# Altium PCB BB8_Flywheel_Motors.PcbDoc
Units mil, origin at the board's own origin, x right, y up, seen from the top; angles counter-clockwise.
Board outline 4810.08 x 1771.99 mil, 2 copper layers (Top Layer, Bottom Layer), stack 59.8 mil thick; 13 components, 2 nets, 33 pads, 240 vias.
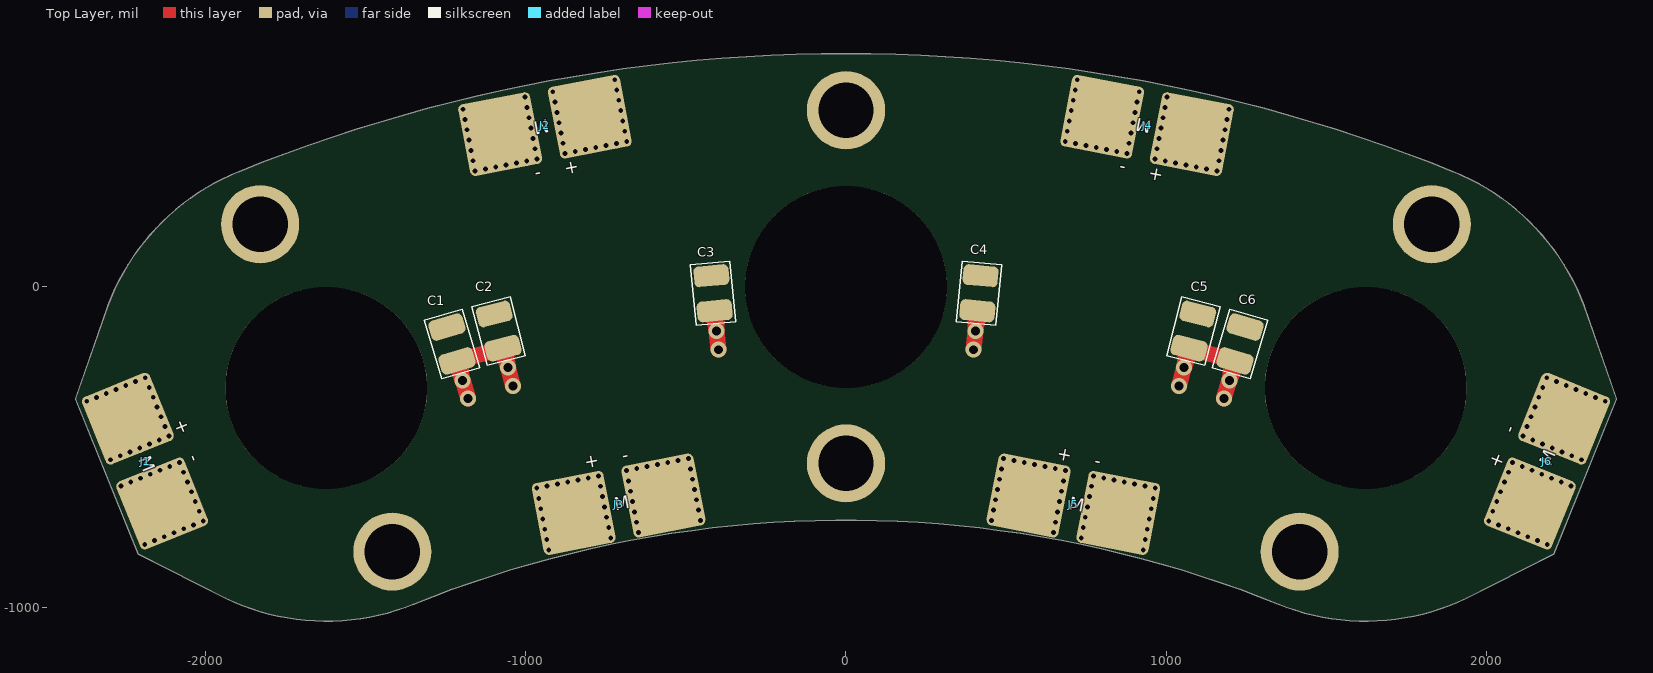
[diagram p0: Top Layer view]
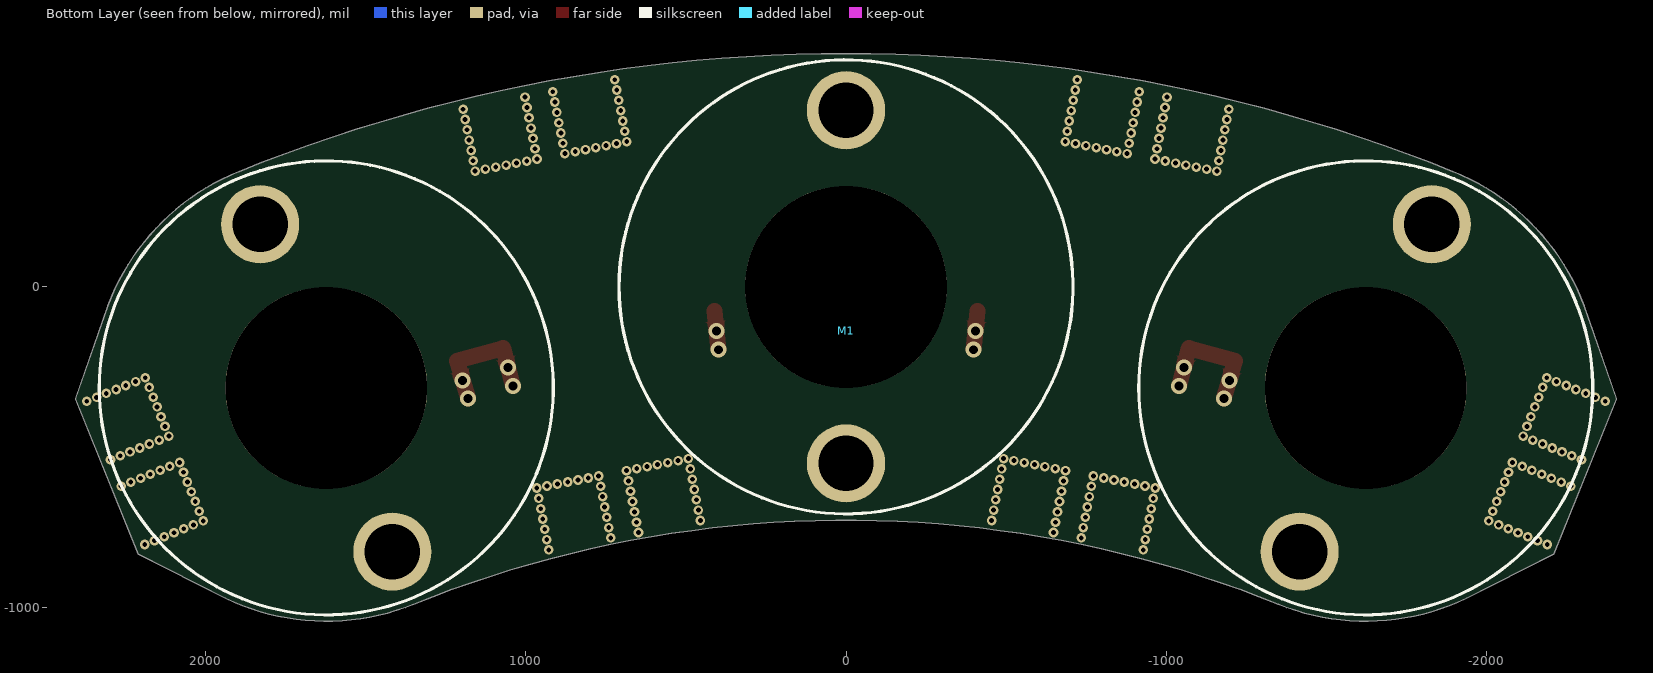
[diagram p1: Bottom Layer view, seen from below]

## Layer stack, top to bottom
Top Solder: solder mask 0.4, Solder Resist, Dk 3.5
Top Layer: signal copper 1.4
Dielectric 1: dielectric 57, FR-4, Dk 4.8
Bottom Layer: signal copper 1.4
Bottom Solder: solder mask 0.4, Solder Resist, Dk 3.5

## Board outline
-2209.1,-834.49 -2405.04,-349.53 -2304.54,-60.28 -2304.54,-60.29 cw(c-1622.31,-315.35) -1895.15,359.96 cw(c0,-4330.71) 1895.15,359.96 cw(c1622.31,-315.35) 2304.54,-60.29 2304.54,-60.28 2405.04,-349.53 2209.1,-834.49 1935.88,-972.75 1935.88,-972.74 cw(c1622.31,-315.35) 1349.47,-990.66 ccw(c0,-4330.71) -1349.47,-990.66 cw(c-1622.31,-315.35) -1935.88,-972.74 -1935.88,-972.75

## Design rules (kind name [scope] priority, off if disabled: settings)
BoardOutlineClearance [All] p1: gap=0 ignorepadtopadclearanceinfootprint=FALSE except(16: Poly-OutlineEdge)
Clearance Clearance_HV [InNetClass('HV') vs NOT ((OnLayer('Top Overlay') OR OnLayer('Bottom Overlay')))] p1: gap=50 ignorepadtopadclearanceinfootprint=FALSE except(0: Arc-Hole Track-Hole SMDPad-Hole THPad-Hole Via-Hole Fill-Hole Poly-Hole Region-Hole Text-Hole; 40: THPad-THPad)
Clearance Clearance_MV [InNetClass('MV') vs NOT ((OnLayer('Top Overlay') OR OnLayer('Bottom Overlay')))] p2: gap=20 ignorepadtopadclearanceinfootprint=FALSE except(0: Arc-Hole Track-Hole SMDPad-Hole THPad-Hole Via-Hole Fill-Hole Poly-Hole Region-Hole Text-Hole)
Clearance "Polygon Clearance" [InPoly] p3: gap=16 ignorepadtopadclearanceinfootprint=FALSE except(0: Arc-Hole Track-Hole SMDPad-Hole THPad-Hole Via-Hole Fill-Hole Poly-Hole Region-Hole Text-Hole)
Clearance [NOT ((OnLayer('Top Overlay') OR OnLayer('Bottom Overlay')))] p4: gap=7.5 ignorepadtopadclearanceinfootprint=FALSE except(0: Arc-Hole Track-Hole SMDPad-Hole THPad-Hole Via-Hole Fill-Hole Poly-Hole Region-Hole Text-Hole)
ComponentClearance [All] p1: gap=0.1 collisioncheckmode=3 verticalgap=0 showdistances=FALSE
DiffPairsRouting [All] p1: maxlimit=12 minlimit=7.5 mostfreqgap=7.5 toplayer_minwidth=6 toplayer_maxwidth=12 toplayer_prefwidth=10 bottomlayer_minwidth=6 bottomlayer_maxwidth=12 bottomlayer_prefwidth=10 maxuncoupledlength=500
Height [All] p1: minheight=0 maxheight=39370.08 prefheight=500
HoleSize [All] p1: absolutevalues=TRUE maxlimit=250 minlimit=15 maxpercent=80.000 minpercent=20.000
MinimumSolderMaskSliver [All] p1 off: minsoldermaskwidth=4
PlaneClearance PlaneClearance_HV [InNetClass('HV')] p1: clearance=50
PlaneClearance PlaneClearance_MV [InNetClass('MV')] p2: clearance=30
PlaneClearance [All] p3: clearance=20
PlaneConnect [All] p1: planeconnectstyle=Relief reliefexpansion=10 reliefentries=4 reliefconductorwidth=12 reliefairgap=6
PolygonConnect [All] p1: thpad.connectstyle=Relief thpad.reliefconductorwidth=80 thpad.reliefentries=4 thpad.polygonreliefangle="90 Angle" thpad.airgapwidth=7.5 smdpad.connectstyle=Direct smdpad.reliefconductorwidth=12 smdpad.reliefentries=4 smdpad.polygonreliefangle="90 Angle" smdpad.airgapwidth=7.5 via.connectstyle=Direct via.reliefconductorwidth=12 via.reliefentries=4 via.polygonreliefangle="90 Angle" via.airgapwidth=7.5
RoutingVias [All] p1: holewidth=15 width=30 viastyle="Through Hole" minholewidth=15 minwidth=20 maxholewidth=250 maxwidth=500
SMDNeckDown [All] p1: percent=100.000
SilkToSilkClearance [All] p1 off: silktosilkclearance=10
SilkToSolderMaskClearance [IsPad] p1: minsilkscreentomaskgap=6 clearancetoexposedcopper=TRUE
SolderMaskExpansion [All] p1: expansion=4
ViasUnderSMD [All] p1: allowed=FALSE
Width [All] p1: maxlimit=1000 minlimit=6 preferedwidth=10 minimp=50.000000 maximp=50.000000 favimp=50.000000 checkconnectedcopper=TRUE
21 further rules are at their usual default settings.

## Components (designator, comment, footprint, x,y, rotation, side; value= is the part's Value field where it differs from the comment)
C1 "C_1210_10uF" 1210_Capacitor -1229.99,-178.34 r106.5 top value=10uF
C2 "C_1210_10uF" 1210_Capacitor -1084.32,-137.94 r104.5 top value=10uF
C3 "C_1210_10uF" 1210_Capacitor -415.08,-19.94 r95.5 top value=10uF
C4 "C_1210_10uF" 1210_Capacitor 415.08,-19.94 r84.5 top value=10uF
C5 "C_1210_10uF" 1210_Capacitor 1084.32,-137.94 r75.5 top value=10uF
C6 "C_1210_10uF" 1210_Capacitor 1229.99,-178.34 r73.5 top value=10uF
J1 "XT60" J_XT60_SMD_RA_Male -2188.12,-543.95 r292 top
J2 "XT60" J_XT60_SMD_RA_Male -939.77,503.99 r191 top
J3 "XT60" J_XT60_SMD_RA_Male -709.9,-678.59 r11 top
J4 "XT60" J_XT60_SMD_RA_Male 939.77,503.99 r169 top
J5 "XT60" J_XT60_SMD_RA_Male 709.9,-678.59 r349 top
J6 "XT60" J_XT60_SMD_RA_Male 2188.12,-543.95 r68 top
M1 "BB8 flywheel motor assembly" BB8_Flywheel_Motors_DC_36mm 0,0 r180 bottom locked

## Footprints (in the part's own frame and the unit in brackets; to place one, negate y for a bottom-side part, rotate by r counter-clockwise, add the part's x,y. Pads: shape width x height; smd on the part's side, far side on the other; paste and mask are expansions set on the pad)
1210_Capacitor [mil] "1210 Capacitor"
  rrect50% 65x110 smd: 1(-55,0) 2(55,0)
  silkscreen extent -95,-62 95,62, body extent -84,-54 82,52, height 36
BB8_Flywheel_Motors_DC_36mm [mm] "3 motors all working together to spin the BB8 Flywheel"
  round 6.2 hole 4.4: 1(-46.451,4.971) 1(0,14) 1(46.451,4.971) 2(-35.962,-20.99) 2(0,-14) 2(35.962,-20.99)
  round 16 hole 16 unplated: ""(-41.207,-8.01) ""(0,0) ""(41.207,-8.01)
  silkscreen extent -59.21,-26.01 59.2,18, body extent -148.1,-189.48 148.1,38, height 98.01
J_XT60_SMD_RA_Male [mm]
  rrect15% 5.8x5.8 smd: 1(-3.625,0) 2(3.625,0)
  body extent -7.95,-19.45 7.95,1.75, height 6.18

## Part data
C1 C2 C3 C4 C5 C6: "CAP CER 10UF 50V 10% X5R 1210", Manufacturer="Taiyo Yuden", Manufacturer PN=UMK325BJ106KM-T, Package=1210, Supplier Part Number 1=587-2247-1-ND, Supplier 1=Digi-Key, SVP Creator="Matt Rogge"
J1 J2 J3 J4 J5 J6: library part J_XT60, "60 Amp XT60 Connector"
M1: library part BB8_Flywheel_Motors

## Via types
v1: diameter 30, hole 15, Top Layer to Bottom Layer, tented bottom, 228 vias
v2: diameter 50, hole 28, Top Layer to Bottom Layer, tented both sides, 12 vias

## Nets (pads, with @x,y where several pads share a name; then routed paths per layer and width w, separated by ;. In a path a pad name is that pad's centre, name@x,y a point inside that pad or via, vN(x,y) a via of type N, cw(c..) or ccw(c..) an arc to the next point about the centre after c; other vN are vias at no path point)
MOTOR+: C1.2 C2.2 C3.2 C4.2 C5.2 C6.2 J1.1 J2.1 J3.1 J4.1 J5.1 J6.1 M1.1
  other v1: -927.83,-821.22 2189.05,-804.41 2158.64,-792.13 -934.1,-789.03 -734.6,-783.66 2128.22,-779.84 2097.8,-767.54 647.64,-766.76 -940.36,-756.83 2067.38,-755.26 -740.87,-751.47 2036.96,-742.97 653.89,-734.56 2006.54,-730.67 454.41,-729.2 -946.61,-724.62 -747.13,-719.26 660.15,-702.36 2018.82,-700.24 460.65,-697 -952.88,-692.41 -753.37,-687.06 666.42,-670.15 2031.11,-669.83 466.91,-664.8 -959.14,-660.21 -759.65,-654.85 2043.41,-639.41 672.67,-637.95 473.19,-632.59 -965.39,-628 -765.91,-622.65 -933.19,-621.73 2262.79,-621.89 -900.98,-615.47 2232.38,-609.62 -868.77,-609.22 2055.69,-608.99 678.93,-605.74 -836.57,-602.95 479.43,-600.39 -804.36,-596.69 2201.96,-597.33 -772.15,-590.44 2171.54,-585.02 2067.98,-578.57 685.2,-573.54 2141.12,-572.75 485.69,-568.18 653,-567.26 620.79,-561 2110.7,-560.45 588.58,-554.76 556.38,-548.48 2080.28,-548.15 524.17,-542.22 -2295.97,-539.76 491.97,-535.98 -2265.57,-527.46 -2235.15,-515.17 -2204.73,-502.89 -2174.31,-490.59 -2143.89,-478.3 -2113.47,-466.02 -2125.75,-435.6 -2138.04,-405.18 -2150.34,-374.76 -2369.71,-357.24 -2339.31,-344.94 -2162.62,-344.34 -2308.89,-332.65 -2278.47,-320.37 -2174.91,-313.92 -2248.05,-308.07 -2217.63,-295.78 -2187.21,-283.5 1157.7,361.38 1125.5,367.63 1093.29,373.89 1061.09,380.16 1028.88,386.41 996.67,392.67 1163.98,393.58 964.47,398.94 -877.52,415.84 -845.31,422.09 1170.24,425.79 -813.1,428.35 970.74,431.14 -780.9,434.62 -748.69,440.87 -716.49,447.13 -883.76,448.05 -684.28,453.4 1176.49,458 977,463.35 -890.02,480.26 -690.53,485.61 1182.76,490.2 983.25,495.56 -896.3,512.46 -696.79,517.82 1189.02,522.4 989.52,527.76 -902.54,544.67 -703.06,550.02 1195.26,554.6 995.78,559.96 -908.8,576.87 -709.31,582.23 1002.03,592.16 -915.07,609.06 -715.57,614.43 -721.84,646.62
MOTOR-: C1.1 C2.1 C3.1 C4.1 C5.1 C6.1 J1.2 J2.2 J3.2 J4.2 J5.2 J6.2 M1.2 | length 1031.5
  Top Layer w50: v2(-1179.67,-348.21) v2(-1196.44,-291.59) C1.1 C2.1 v2(-1054.75,-252.29) v2(-1039.96,-309.47) ; C3.1 v2(-403.76,-137.51) v2(-398.1,-196.29) ; v2(398.1,-196.29) v2(403.76,-137.51) C4.1 ; v2(1039.96,-309.47) v2(1054.75,-252.29) C5.1 C6.1 v2(1196.44,-291.59) v2(1179.67,-348.21)
  other v1: 927.83,-821.22 -2189.05,-804.41 -2158.64,-792.13 934.1,-789.03 734.6,-783.66 -2128.22,-779.84 -2097.8,-767.54 -647.64,-766.76 940.36,-756.83 -2067.38,-755.26 740.84,-751.47 -2036.96,-742.97 -653.91,-734.57 -2006.54,-730.67 -454.41,-729.2 946.61,-724.62 747.1,-719.26 -660.17,-702.36 -2018.84,-700.26 -460.65,-697 952.88,-692.41 753.37,-687.06 -2031.14,-669.84 -666.42,-670.15 -466.91,-664.8 959.14,-660.21 759.62,-654.85 -2043.41,-639.41 -672.69,-637.95 -473.19,-632.59 965.39,-628 765.88,-622.64 -2262.79,-621.89 933.18,-621.75 900.97,-615.49 -2232.39,-609.59 -2055.72,-609 868.77,-609.22 -678.95,-605.75 836.56,-602.97 -479.43,-600.39 -2201.97,-597.3 804.36,-596.71 772.15,-590.44 -2171.54,-585.02 -2068.01,-578.58 -685.2,-573.54 -2141.13,-572.72 -485.69,-568.18 -652.99,-567.29 -620.79,-561.03 -2110.71,-560.43 -588.58,-554.76 -556.37,-548.51 -2080.28,-548.15 -524.17,-542.25 2295.97,-539.76 -491.97,-535.98 2265.56,-527.48 2235.14,-515.19 2204.73,-502.89 2174.3,-490.61 2143.88,-478.32 2113.47,-466.02 2125.77,-435.61 2138.06,-405.19 2150.34,-374.76 2369.71,-357.24 2339.31,-344.94 2162.64,-344.35 2308.89,-332.65 2278.47,-320.37 2174.93,-313.93 2248.05,-308.07 2217.63,-295.78 2187.21,-283.5 -1157.7,361.38 -1125.5,367.65 -1093.3,373.91 -1061.09,380.16 -1028.88,386.43 -996.68,392.69 -1163.98,393.58 -964.47,398.94 877.52,415.84 845.31,422.11 -1170.24,425.79 813.11,428.37 -970.72,431.15 780.9,434.62 748.7,440.89 716.49,447.16 883.79,448.05 684.28,453.4 -1176.48,458 -976.98,463.35 890.05,480.25 690.53,485.61 -1182.76,490.2 -983.25,495.56 896.3,512.46 696.79,517.82 -1189.02,522.4 -989.5,527.76 902.57,544.66 703.06,550.02 -1195.26,554.6 -995.76,559.97 908.83,576.87 709.31,582.23 -1002.03,592.16 915.07,609.06 715.57,614.43 721.84,646.62
pads on no net: M1.

## Polygon pours and split planes (outlines as drawn)
MOTOR+ on Top Layer "Motor+" (solid, remove dead copper, shelved, pour order 0): -3937.01,1279.53 3937.01,1279.53 3937.01,-1476.38 -3937.01,-1476.38
MOTOR- on Bottom Layer "Motor-" (solid, remove dead copper, shelved, pour order 2): 3937.01,1279.53 -3937.01,1279.53 -3937.01,-1476.38 3937.01,-1476.38

## Silkscreen, mask and mechanical layers (free items; w line width, h text height)
Mechanical 1:
  lines w10: -2304.54,-60.28 -2405.04,-349.53 -2209.1,-834.49 -1935.88,-972.75 ; 1935.88,-972.75 2209.1,-834.49 2405.04,-349.53 2304.54,-60.28
Mechanical 13:
  lines w10: -2304.54,-60.29 cw(c-1622.31,-315.35) -1895.15,359.96 cw(c0,-4330.71) 1895.15,359.96 cw(c1622.31,-315.35) 2304.54,-60.29 ; -1935.88,-972.74 ccw(c-1622.31,-315.35) -1349.47,-990.66 cw(c0,-4330.71) 1349.47,-990.66 ccw(c1622.31,-315.35) 1935.88,-972.74

## Text inside footprints (layer, text, board x,y; h text height)
J1: Top Overlay "+" at -2098.98,-423.01 h39.37 r292; Top Overlay "-" at -2054.74,-532.52 h39.37 r292; Top Overlay "M" at -2209.34,-538.73 h39.37 r292
J2: Top Overlay "+" at -838.06,393.42 h39.37 r191; Top Overlay "-" at -954,370.88 h39.37 r191; Top Overlay "M" at -930.59,523.83 h39.37 r191
J3: Top Overlay "+" at -811.61,-568.02 h39.37 r11; Top Overlay "-" at -695.67,-545.48 h39.37 r11; Top Overlay "M" at -719.08,-698.43 h39.37 r11
J4: Top Overlay "+" at 992.65,363.37 h39.37 r169; Top Overlay "-" at 876.71,385.91 h39.37 r169; Top Overlay "M" at 955.71,518.94 h39.37 r169
J5: Top Overlay "+" at 657.02,-537.97 h39.37 r349; Top Overlay "-" at 772.96,-560.5 h39.37 r349; Top Overlay "M" at 693.96,-693.54 h39.37 r349
J6: Top Overlay "+" at 2039.99,-569.03 h39.37 r68; Top Overlay "-" at 2084.24,-459.52 h39.37 r68; Top Overlay "M" at 2199.76,-562.45 h39.37 r68